# EAGLE board Leah board (EAGLE 7.2.0)
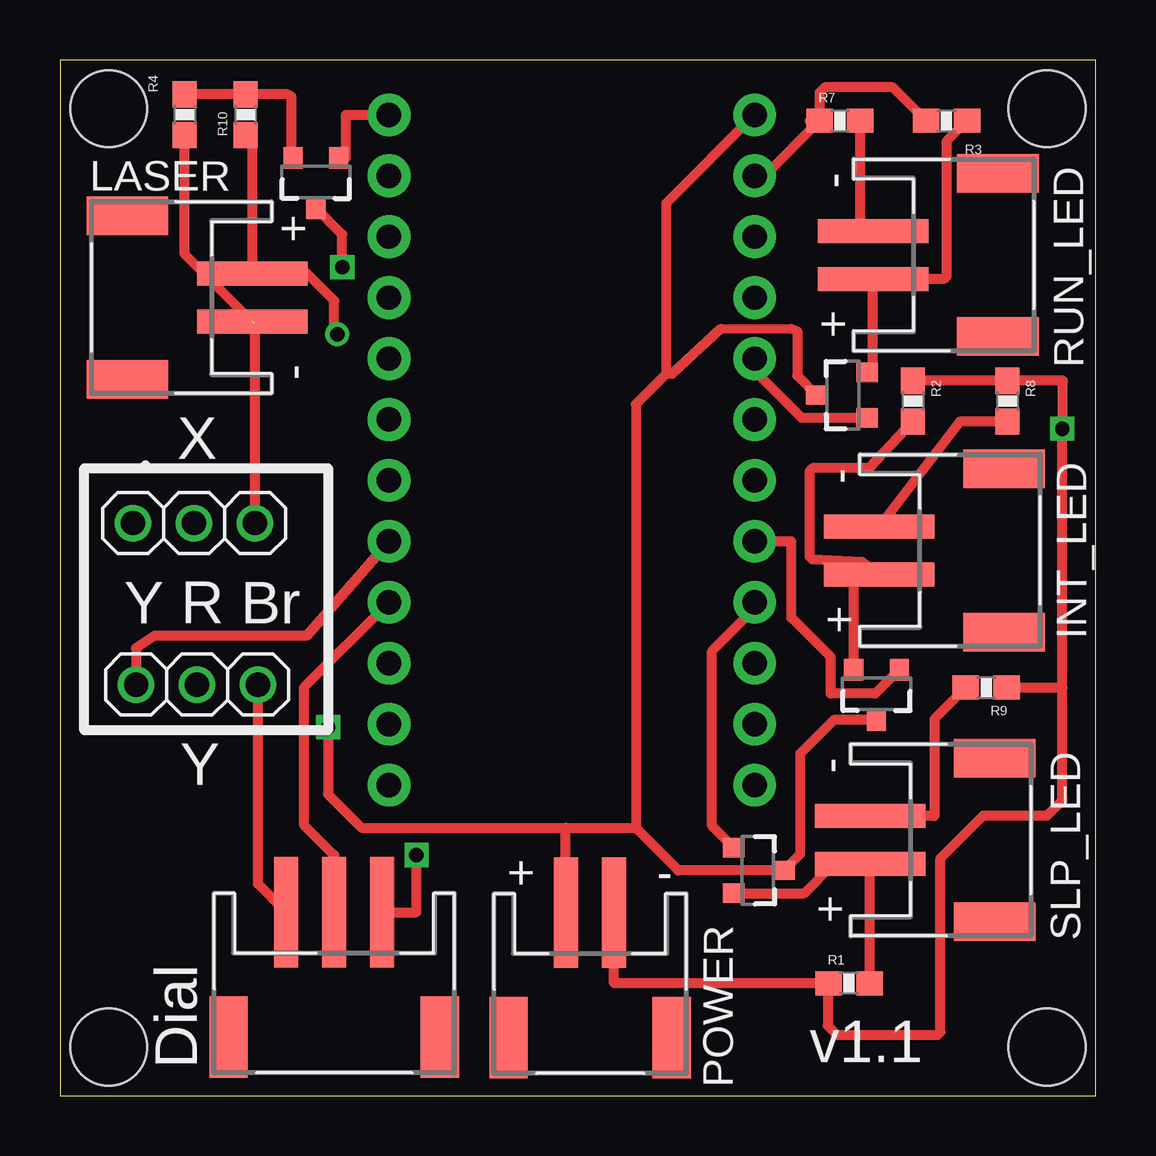
[diagram p0: board, top side]
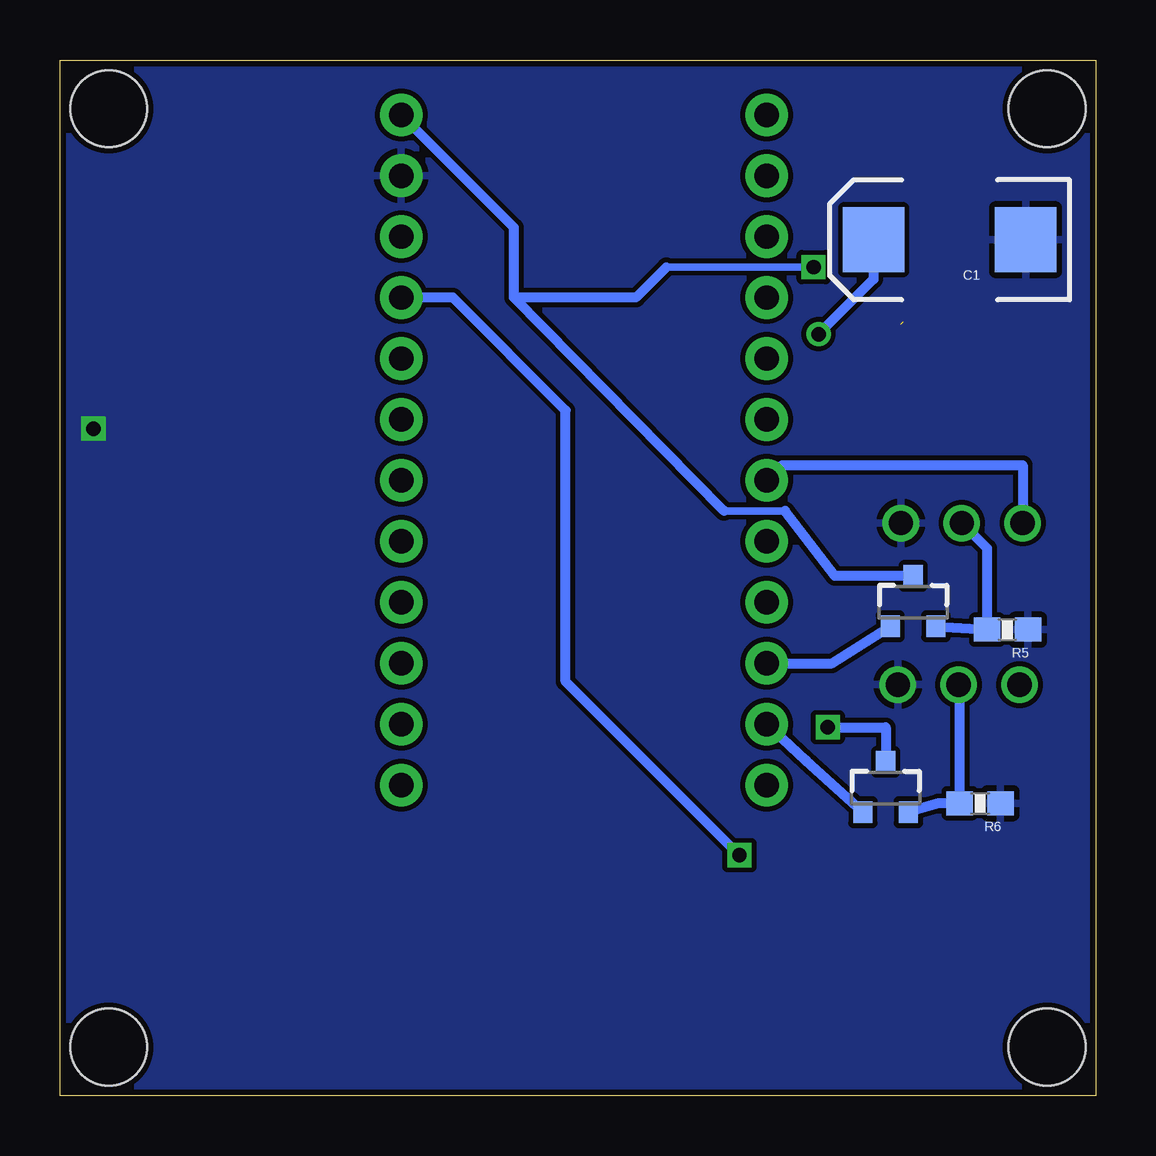
[diagram p1: board, bottom side, seen from below]

Size 43.18 x 43.18 mm. Coordinates in mm from the lower left corner, seen from the top.
Outline: 43.18,43.18 0,43.18 0,0 43.18,0 43.18,43.18
Copper layers (1*16): Top 0.035mm / dielectric 1.5mm / Bottom 0.035mm
Design rules "adafruit": minimum track width 8mil, minimum drill 15.5mil, track to track 8mil, track to pad 8mil, pad to pad 8mil, via to via 8mil, smd to smd 8mil, copper to edge 10mil, drill to drill 8mil, minimum pad ring 10mil, minimum via ring 8mil, stop-mask expansion 2mil, vias tented up to drill 20mil, thermal gap 10mil
Net classes: 1 power: width 0.305 mm
Holes 3.2 mm at 2.03,2.03 2.03,41.15 41.15,2.03 41.15,41.15

## Footprints (pad centres in the part's own frame; a part is rotated, then mirrored left to right if it is on the bottom)
EIA7343 = smd 2.55 x 2.7: A 3.17,0; C -3.17,0
JST-PH-2-SMT-RA = smd 1 x 4.6: 1 1,-3.7; 2 -1,-3.7 | smd 1.6 x 3.4: NC1 -3.4,1.5; NC2 3.4,1.5
SOT23-3 = smd 0.8 x 0.9: 1 -0.95,-1; 2 0.95,-1; 3 0,1.1
1X12-CB = drill 1.016 pad 1.778: 1 -13.97,0; 2 -11.43,0; 3 -8.89,0; 4 -6.35,0; 5 -3.81,0; 6 -1.27,0; 7 1.27,0; 8 3.81,0; 9 6.35,0; 10 8.89,0; 11 11.43,0; 12 13.97,0
JSTPH3 = smd 1 x 4.6: 1 -2,-2.7; 2 0,-2.7; 3 2,-2.7 | smd 1.6 x 3.4: NC1 -4.4,2.5; NC2 4.4,2.5
0603-RES = smd 1.1 x 1: 1 -0.85,0; 2 0.85,0
1X03 = drill 1.016: 1 -2.54,0; 2 0,0; 3 2.54,0

## Placement (x,y rotation side)
C1  100uF  [EIA7343]  6.1,35.69 180 bottom
INT_LED  [JST-PH-2-SMT-RA]  37.85,22.73 270 top
INT_MOS  200mA/50V  [SOT23-3]  34.04,16.76 180 top
JP1  [1X12-CB]  28.96,26.92 270 top
JP4  [1X12-CB]  13.72,26.92 270 top
LASER  [JST-PH-2-SMT-RA]  4.32,33.27 90 top
LASER_MOS  200mA/50V  [SOT23-3]  10.67,38.1 180 top
POT  [JSTPH3]  11.43,4.95 180 top
POWER  [JST-PH-2-SMT-RA]  22.1,3.94 180 top
R1  10K  [0603-RES]  32.89,4.7 0 top
R2  10K  [0603-RES]  35.56,28.96 270 top
R3  10K  [0603-RES]  36.96,40.64 0 top
R4  10K  [0603-RES]  5.21,40.89 90 top
R5  10K  [0603-RES]  3.68,19.43 180 bottom
R6  10K  [0603-RES]  4.83,12.19 180 bottom
R7  330  [0603-RES]  32.51,40.64 0 top
R8  330  [0603-RES]  39.5,28.96 270 top
R9  330  [0603-RES]  38.61,17.02 180 top
R10  39  [0603-RES]  7.75,40.89 90 top
RUN_LED  [JST-PH-2-SMT-RA]  37.59,35.05 270 top
RUN_MOS  200mA/50V  [SOT23-3]  32.64,29.21 90 top
SLEEP_MOS  200mA/50V  [SOT23-3]  29.08,9.4 270 top
SLP_LED  [JST-PH-2-SMT-RA]  37.47,10.67 270 top
X_MOS  2.6A/20V  [SOT23-3]  7.62,20.57 0 bottom
X_SERVO  [1X03]  5.59,23.88 180 top
Y_MOS  2.6A/20V  [SOT23-3]  8.76,12.83 0 bottom
Y_SERVO  [1X03]  5.71,17.14 0 top

## Library data of the parts
C1 = SparkFun-Capacitors; PROD_ID: CAP-07890
INT_LED JP1 JP4 LASER POT POWER RUN_LED SLP_LED X_SERVO Y_SERVO = adafruit
INT_MOS LASER_MOS RUN_MOS SLEEP_MOS X_MOS Y_MOS = SparkFun-DiscreteSemi; PROD_ID: TRANS-00830
R1-R6 R10 = SparkFun-Resistors; PROD_ID: RES-00824
R7-R9 = SparkFun-Resistors; PROD_ID: RES-11057

## Nets
5V: JP1.4 POT.1
A5: JP4.12
AREF: JP4.6
D5: JP1.7
D6: JP1.6
D10: JP4.2
D11: JP4.3
D12: JP4.4
D13: JP4.5
GND [power]: C1.C JP1.2 LASER.2 POT.3 POWER.2 R1.1 R2.1 R3.1 R4.1 R5.1 R6.1 R7.1 R8.1 R9.1 X_SERVO.1 Y_SERVO.3
INT_LED_PIN: INT_MOS.1 JP1.8
INT_LED_PWR: INT_LED.1 INT_MOS.2 R2.2
LASER_PIN: JP4.1 LASER_MOS.1
LASER_PWR: LASER_MOS.2 R4.2 R10.2
N$1: C1.A LASER.1 R10.1
N$6: R6.2 Y_MOS.2 Y_SERVO.2
N$7: R5.2 X_MOS.2 X_SERVO.2
N$8: R7.2 RUN_LED.2
N$9: INT_LED.2 R8.2
N$10: R9.2 SLP_LED.2
POT_IN: JP4.9 POT.2
RESET: JP1.12
RUN_LED_PIN: JP1.5 RUN_MOS.1
RUN_LED_PWR: R3.2 RUN_LED.1 RUN_MOS.2
RXD: JP1.11
SLP_LED_PIN: JP1.9 SLEEP_MOS.1
SLP_LED_PWR: R1.2 SLEEP_MOS.2 SLP_LED.1
TXD: JP1.10
VBAT: INT_MOS.3 JP1.1 LASER_MOS.3 POWER.1 RUN_MOS.3 SLEEP_MOS.3 X_MOS.3 Y_MOS.3
VBUS [power]: JP1.3
X_PWM_PIN: JP4.7 X_SERVO.3
X_PWR_PIN: JP4.10 X_MOS.1
Y_PWM_PIN: JP4.8 Y_SERVO.1
Y_PWR_PIN: JP4.11 Y_MOS.1

## Tracks (layer width: path | path; a pad name or v marks a point on that pad's centre or on a via)
5V  (via drill 0.6)
  Top 0.406: POT.1 14.86,7.65 v14.86,10.03
  Bottom 0.406: v14.86,10.03 22.1,17.27 22.1,28.57 26.8,33.27 JP1.4
GND  (via drill 0.6)  (1 unrouted)
  Top 0.406: R9.1 41.78,17.02 | 41.78,17.02 v41.78,27.81 41.78,29.72 41.82,29.81 R8.1 R2.1 | POWER.2 23.1,4.7 R1.1 32,4.66 32,2.92 32.38,2.54 36.58,2.54 36.7,2.67 36.7,9.91 38.48,11.68 41.15,11.68 41.78,12.32 41.78,17.02 | 31.24,40.64 R7.1 | X_SERVO.1 8.13,32.16 7.75,32.16 7.75,32.27 | POT.3 8.26,8.83 Y_SERVO.3 | R3.1 34.71,42.04 31.88,42.04 31.66,41.82 R7.1 | LASER.2 5.21,35.09 R4.1 | JP1.2 29.38,38.35 R7.1
  pour Bottom: 0,43.18 0,0 43.18,0 43.18,43.18
INT_LED_PIN
  Top 0.406: JP1.8 30.48,23.11 30.48,19.94 32.13,18.29 32.13,16.76 33.99,16.76 INT_MOS.1
INT_LED_PWR
  Top 0.406: R2.2 33.74,26.16 31.37,26.16 31.24,26.04 31.24,22.48 31.35,22.37 33.43,22.27 | 33.43,22.27 INT_LED.1 | INT_MOS.2 33.09,21.93 33.43,22.27
LASER_PIN
  Top 0.406: LASER_MOS.1 11.92,39.1 11.92,40.89 JP4.1
LASER_PWR
  Top 0.406: LASER_MOS.2 9.65,39.17 9.65,41.66 9.49,41.74 R10.2 R4.2
N$1  (via drill 0.6)
  Top 0.406: R10.1 8.02,39.77 LASER.1 8.75,34.27 8.89,34.42 10.16,34.42 11.43,33.15 11.43,31.88 v11.56,31.75
  Bottom 0.406: C1.A 9.27,34.04 v11.56,31.75
N$6
  Bottom 0.406: Y_MOS.2 6.56,12.19 R6.2 5.68,17.11 Y_SERVO.2
N$7
  Bottom 0.406: X_MOS.2 4.55,19.45 R5.2 4.53,22.82 X_SERVO.2
N$8
  Top 0.406: 32.17,36.05 RUN_LED.2 33.36,36.05 R7.2
N$9
  Top 0.406: R8.2 37.5,28.11 INT_LED.2
N$10
  Top 0.406: R9.2 36.45,15.71 36.45,11.68 36.43,11.67 SLP_LED.2
POT_IN
  Top 0.406: JP4.9 10.16,17.02 10.16,11.3 11.43,10.03 POT.2
RUN_LED_PIN
  Top 0.406: RUN_MOS.1 30.92,28.26 28.96,30.23 JP1.5
RUN_LED_PWR
  Top 0.406: RUN_MOS.2 33.89,30.41 RUN_LED.1 36.85,34.05 36.96,34.16 36.96,39.79 R3.2
SLP_LED_PIN
  Top 0.406: SLEEP_MOS.1 27.18,11.25 27.18,18.54 28.96,20.32 JP1.9
SLP_LED_PWR
  Top 0.406: R1.2 33.77,4.72 SLP_LED.1 32.24,9.67 31.02,8.45 SLEEP_MOS.2
VBAT  (via drill 0.6)
  Top 0.381: 27.56,31.98 30.48,31.98
  Top 0.406: POWER.1 21.08,8.27 21.08,11.18 | INT_MOS.3 32.26,15.66 30.86,14.27 30.86,10.08 SLEEP_MOS.3 25.78,9.4 24,11.18 | 25.27,30.1 24,28.83 24,11.18 | v11.18,15.37 11.18,12.57 12.57,11.18 21.08,11.18 | 21.08,11.18 24,11.18 | v11.77,34.54 11.77,35.9 LASER_MOS.3 | 25.27,30.1 25.27,37.21 JP1.1 | 25.27,30.1 25.53,30.1 27.56,31.98 | 30.48,31.98 30.73,31.88 30.73,30.02 RUN_MOS.3
  Bottom 0.305: v11.77,34.54 17.91,34.54 | 12.95,24.38 15.49,24.38
  Bottom 0.406: v11.18,15.37 8.76,15.37 Y_MOS.3 | 17.91,34.54 19.18,33.27 24.26,33.27 | X_MOS.3 10.88,21.67 12.95,24.38 | 15.49,24.38 24.26,33.27 | 24.26,33.27 24.26,36.2 JP1.1
X_PWM_PIN
  Bottom 0.406: JP4.7 13.08,26.29 3.05,26.29 X_SERVO.3
X_PWR_PIN
  Bottom 0.406: JP4.10 11,18.03 X_MOS.1
Y_PWM_PIN
  Top 0.406: JP4.8 10.29,19.18 3.94,19.18 3.17,18.67 Y_SERVO.1
Y_PWR_PIN
  Bottom 0.406: Y_MOS.1 12.08,13.99 JP4.11

## Text on the board
tNames: X | Y R Br | Y | Dial | v1.1
tDocu: 9 | ~ | + | ~ | BAT | G | 10 | 11 | ~ | BUS | 12 | 13 | 5V | 8 | Ar | 6 | ~ | A0 | ~ | A1 | 5 | 4 | A2 | ~ | A3 | 3 | TX | A4 | A5 | RX